# EAGLE board Opto Board (EAGLE 6.4)
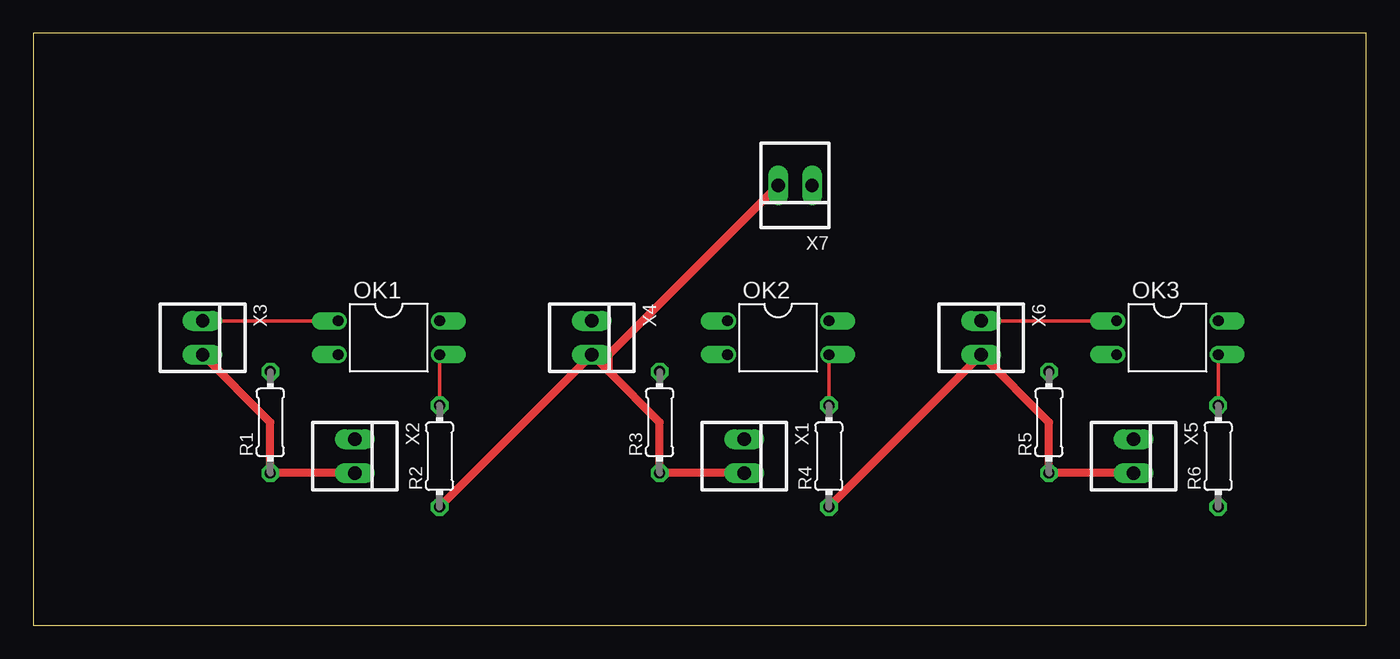
[diagram p0: board, top side]
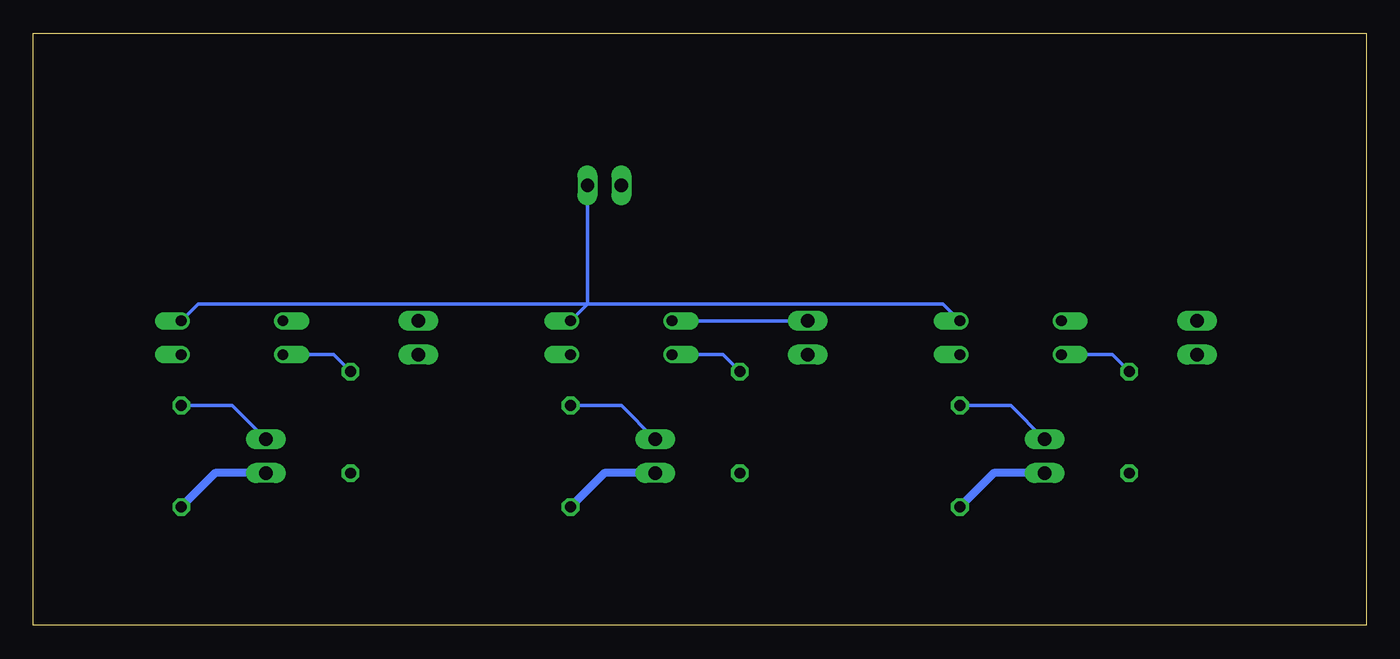
[diagram p1: board, bottom side, seen from below]

Size 100 x 44.44 mm. Coordinates in mm from the lower left corner, seen from the top.
Outline: 0,0 100,0 100,44.44 0,44.44 0,0
Copper layers (1*16): Top 0.035mm / dielectric 1.5mm / Bottom 0.035mm
Design rules "default": minimum track width 10mil, minimum drill 24mil, track to track 8mil, track to pad 8mil, pad to pad 8mil, via to via 8mil, smd to smd 8mil, copper to edge 40mil, drill to drill 8mil, minimum pad ring 10mil, minimum via ring 8mil, stop-mask expansion 4mil, vias tented up to drill 0mil, thermal gap 10mil
Net classes: 1 GND: width 0.61 mm, drill 0.61 mm, clearance 0.61 mm

## Footprints (pad centres in the part's own frame; a part is rotated, then mirrored left to right if it is on the bottom)
DIL04 = drill 0.813 offset: 1 -1.27,-3.81; 2 1.27,-3.81; 3 1.27,3.81; 4 -1.27,3.81
0204/7 = drill 0.813 octagon: 1 -3.81,0; 2 3.81,0
22-23-2021 = drill 1 long: 1 -1.27,0; 2 1.27,0

## Placement (x,y rotation side)
OK1  LTV816  [DIL04]  26.67,21.59 270 top
OK2  LTV816  [DIL04]  55.88,21.59 270 top
OK3  LTV816  [DIL04]  85.09,21.59 270 top
R1  1000  [0204/7]  17.78,15.24 90 top
R2  5000  [0204/7]  30.48,12.7 90 top
R3  1000  [0204/7]  46.99,15.24 90 top
R4  5000  [0204/7]  59.69,12.7 90 top
R5  1000  [0204/7]  76.2,15.24 90 top
R6  5000  [0204/7]  88.9,12.7 90 top
X1  22-23-2021  [22-23-2021]  53.34,12.7 270 top
X2  22-23-2021  [22-23-2021]  24.13,12.7 270 top
X3  22-23-2021  [22-23-2021]  12.7,21.59 270 top
X4  22-23-2021  [22-23-2021]  41.91,21.59 270 top
X5  22-23-2021  [22-23-2021]  82.55,12.7 270 top
X6  22-23-2021  [22-23-2021]  71.12,21.59 270 top
X7  22-23-2021  [22-23-2021]  57.15,33.02 180 top

## Library data of the parts
OK1-OK3 = optocoupler; OC_FARNELL: unknown; OC_NEWARK: unknown
R1-R6 = rcl
X1-X7 = con-molex; MF: MOLEX; MPN: 22-23-2021; OC_FARNELL: 1462926; OC_NEWARK: 25C3832

## Nets
GND [GND]: R1.1 R2.1 R3.1 R4.1 R5.1 R6.1 X1.2 X2.2 X3.2 X4.2 X5.2 X6.2 X7.2
N$1: OK1.1 X3.1
N$2: OK1.2 R1.2
N$3: OK2.1 X4.1
N$4: OK3.1 X6.1
N$5: OK2.2 R3.2
N$6: OK1.3 R2.2 X2.1
N$7: OK3.2 R5.2
N$8: OK2.3 R4.2 X1.1
N$9: OK3.3 R6.2 X5.1
N$10: OK1.4 OK2.4 OK3.4 X7.1

## Tracks (layer width: path | path; a pad name or v marks a point on that pad's centre or on a via)
GND
  Top 0.61: X5.2 R5.1 76.2,15.24 X6.2 R4.1 | X2.2 R1.1 17.78,15.24 X3.2 | X1.2 R3.1 46.99,15.24 43.18,19.05 | 43.18,19.05 X4.2 R2.1 | X7.2 43.18,20.32 43.18,19.05
  Bottom 0.61: R6.1 86.36,11.43 X5.2 | R2.1 27.94,11.43 X2.2 | R4.1 57.15,11.43 X1.2
N$1
  Top 0.254: X3.1 OK1.1
N$2
  Bottom 0.254: R1.2 19.05,20.32 OK1.2
N$3
  Bottom 0.254: X4.1 OK2.1
N$4
  Top 0.254: X6.1 OK3.1
N$5
  Bottom 0.254: R3.2 48.26,20.32 OK2.2
N$6
  Top 0.254: OK1.3 R2.2
  Bottom 0.254: X2.1 26.67,16.51 R2.2
N$7
  Bottom 0.254: R5.2 77.47,20.32 OK3.2
N$8
  Top 0.254: OK2.3 R4.2
  Bottom 0.254: X1.1 55.88,16.51 R4.2
N$9
  Top 0.254: OK3.3 R6.2
  Bottom 0.254: X5.1 85.09,16.51 R6.2
N$10
  Bottom 0.254: OK1.4 31.75,24.13 58.42,24.13 | OK2.4 58.42,24.13 | OK3.4 87.63,24.13 58.42,24.13 | 58.42,24.13 X7.1